# Altium PCB Main.PcbDoc (part 2 of 3)
Units mm, origin at the board's own origin, x right, y up, seen from the top; angles counter-clockwise.
Board outline 100 x 100 mm, 4 copper layers (Top Layer, Layer 2, Layer 3, Bottom Layer), stack 1.606 mm thick; 196 components, 147 nets, 684 pads, 739 vias.
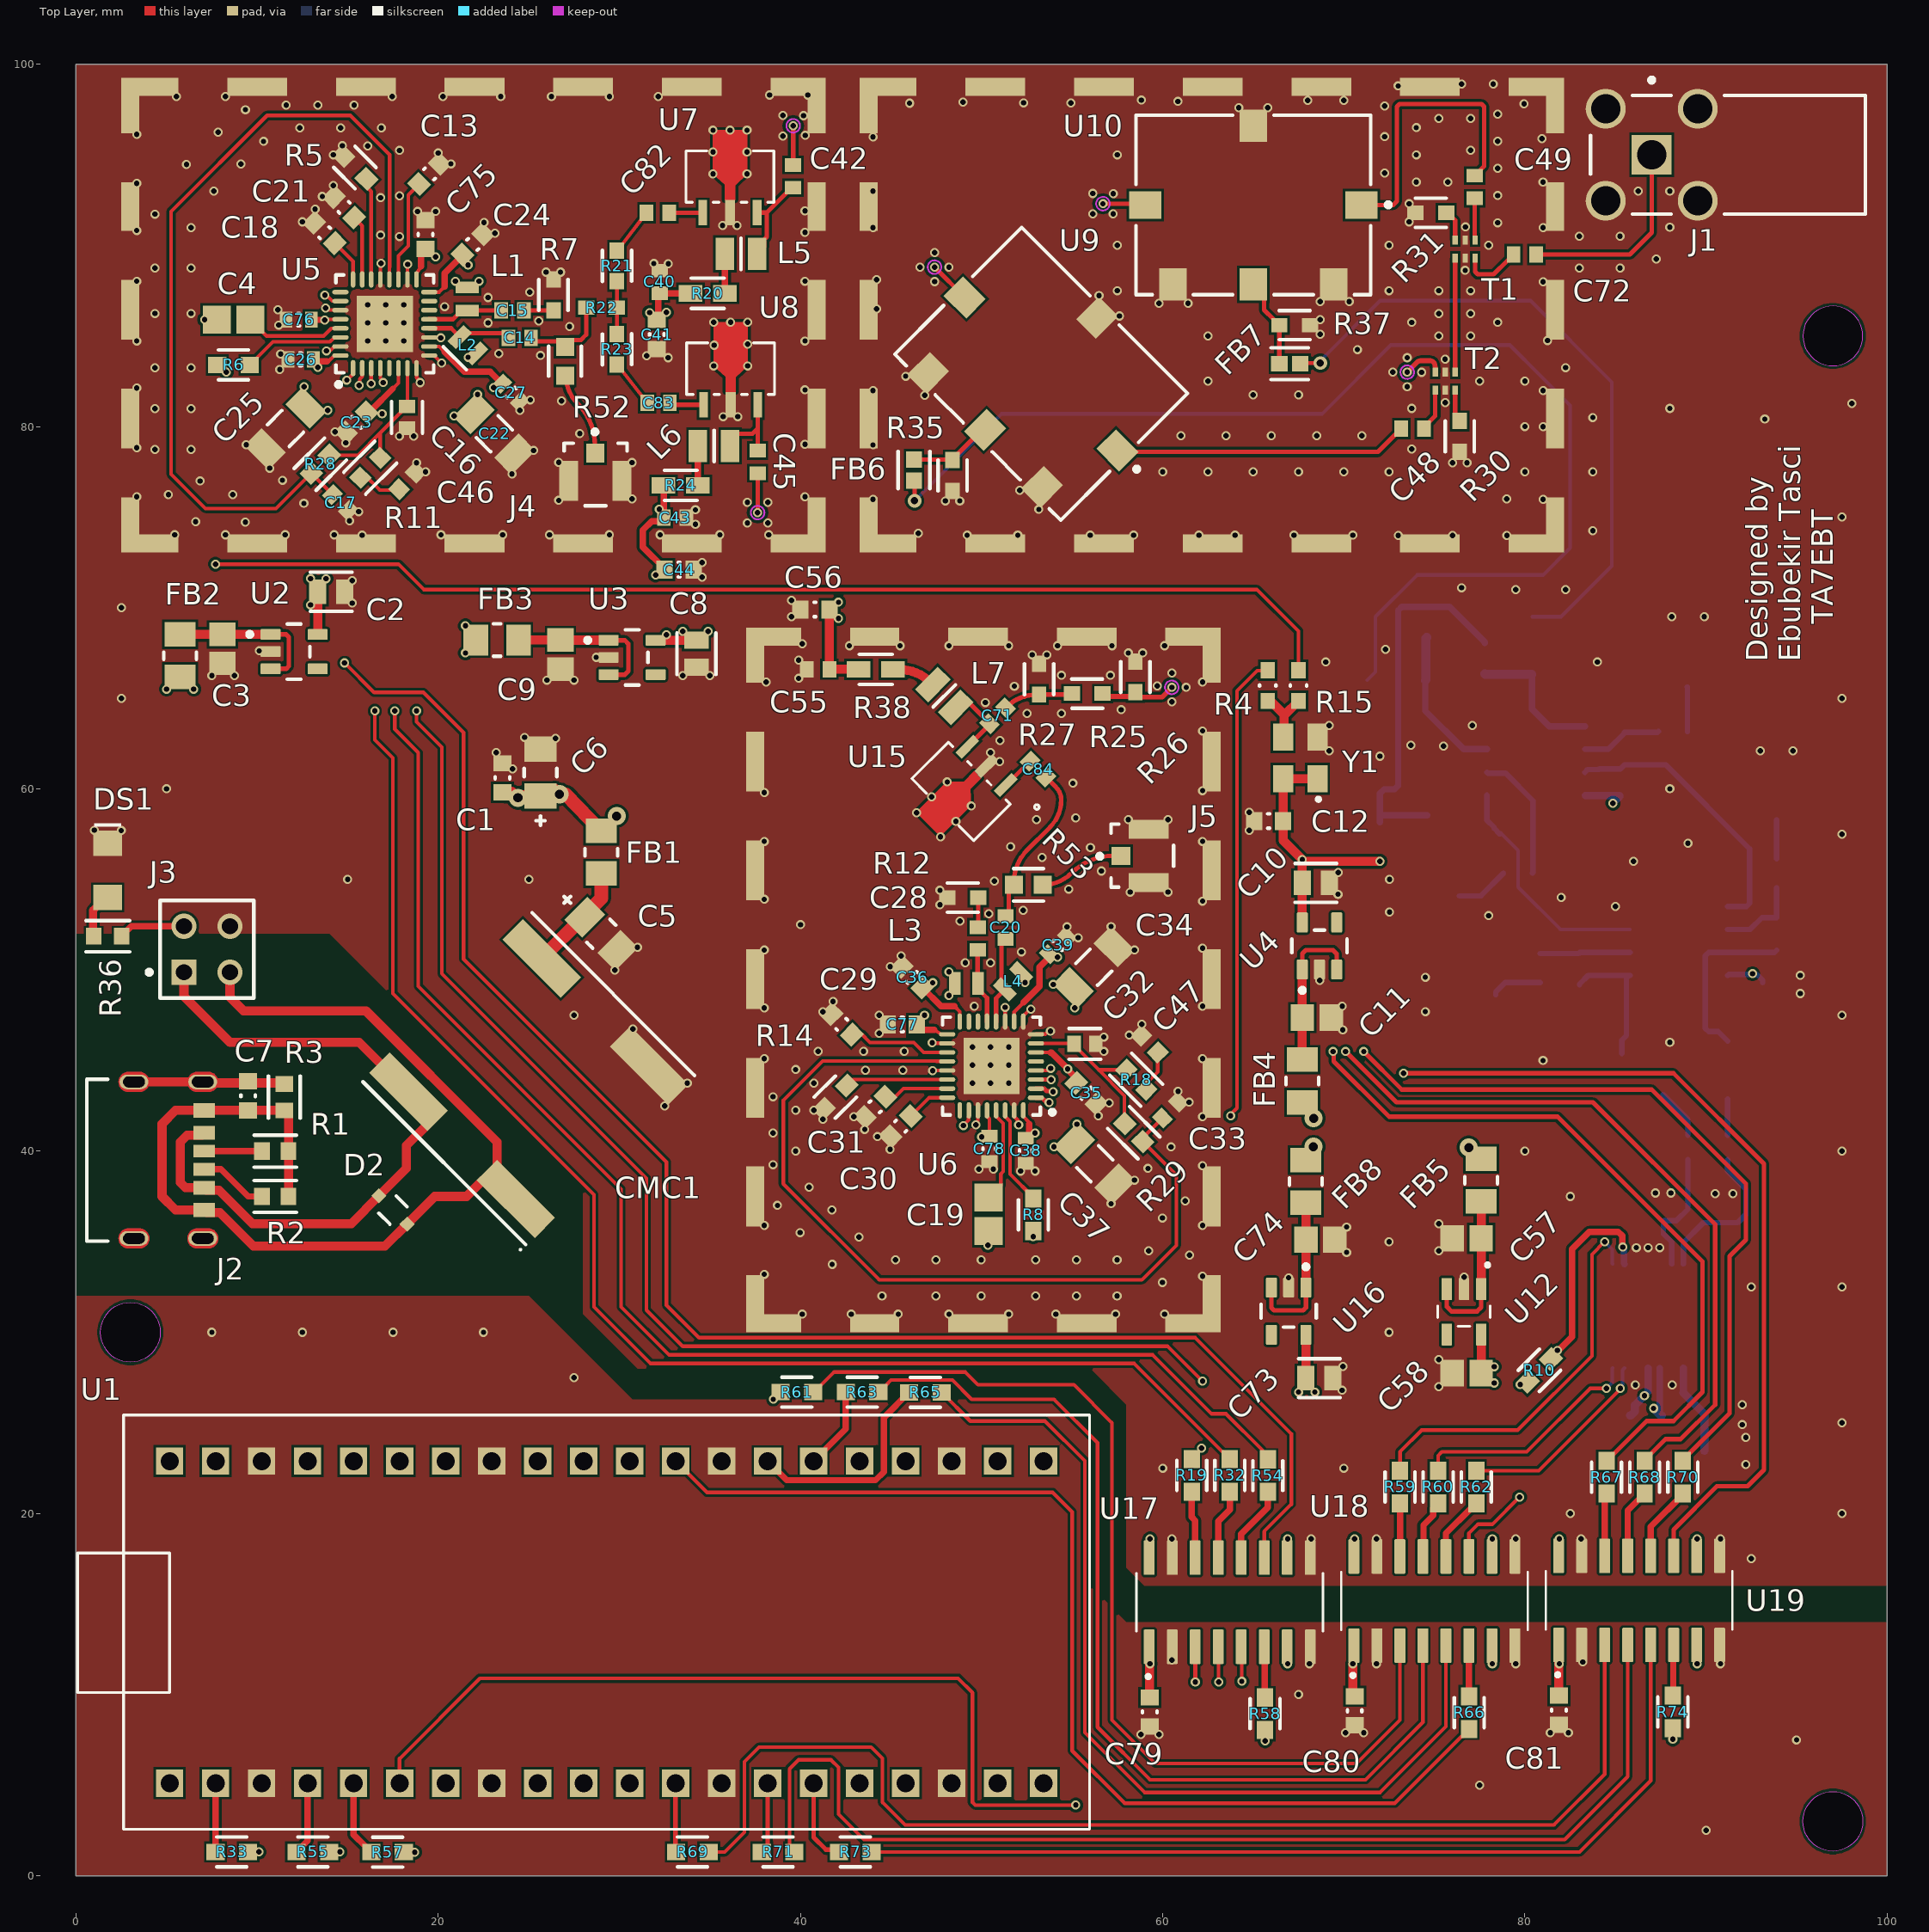
[diagram p0: Top Layer view]

## Part data (continued)
R5 R14 R42 R43 R46 R47: library part CMP-03211-011109-1, "RES SMD 4.7kΩ 0.1% 1/16W 0603", Manufacturer="TE Connectivity", Manufacturer Part Number=CPF0603B15RE, Package=CPF0603, Power Rating=0.063W, Resistance=4.7kΩ, Temperature="-55°C to +155°C", Temperature Coefficient=25ppm/°C, Temperature Range High=+155°C, Temperature Range Low=-55°C, Tolerance=0.1%, Voltage Rating=50V, Automotive=No, Category=Res, ComponentLink2Description=Datasheet, ComponentLink2URL=https://www.te.com/commerce/DocumentDelivery/DDEController?Action=showdoc&DocId=Data+Sheet%7F1773200%7FM%7Fpdf%7FEnglish%7FENG_DS_1773200_M.pdf%7F3-1676481-2, Composition="Thin Film", Device Class L1="Passive Components", Device Class L2=Resistors, Device Class L3="Chip SMD Resistors", Height=0.55mm, Ipc Land Pattern Name=RESC15580X45, Lead Free=Yes, Octopart=https://octopart.com/cpf0603b15re-te+connectivity-23283246, octopart_url=https://octopart.com/cpf0603b15re-te+connectivity-23283246, Packaging="5k Reel", RoHS=TRUE, Series=CPF
R6 R8 R10 R19 R32 R33 R54 R55 R57 R58 R59 R60 R61 R62 R63 R65 R66 R67 R68 R69 R70 R71 R73 R74: library part CMP-03211-006902-1, "RES SMD 33Ω 0.1% 1/16W 0603", Manufacturer="TE Connectivity", Manufacturer Part Number=CPF0603B430RE1, Package=CPF0603, Power Rating=0.063W, Resistance=33Ω, Temperature="-55°C to +155°C", Temperature Coefficient=25ppm/°C, Temperature Range High=+155°C, Temperature Range Low=-55°C, Tolerance=0.1%, Voltage Rating=50V, Automotive=No, Category=Res, ComponentLink2Description=Datasheet, ComponentLink2URL=https://www.te.com/commerce/DocumentDelivery/DDEController?Action=showdoc&DocId=Data+Sheet%7F1773200%7FM%7Fpdf%7FEnglish%7FENG_DS_1773200_M.pdf%7F3-1676481-2, Composition="Thin Film", Device Class L1="Passive Components", Device Class L2=Resistors, Device Class L3="Chip SMD Resistors", Height=0.55mm, Ipc Land Pattern Name=RESC15580X45, Lead Free=Yes, Octopart=https://octopart.com/cpf0603b430re1-te+connectivity-22738753, octopart_url=https://octopart.com/cpf0603b430re1-te+connectivity-22738753, Packaging="1k Reel", RoHS=TRUE, Series=CPF
R7 R12 R30 R31 R35 R37: library part CMP-03412-022019-1, "RES SMD 49.9 OHM 1% 1/10W 0603", Manufacturer=Yageo, Manufacturer Part Number=RT0603FRD0749R9L, Package=RT0603, Power Rating=0.1W, Resistance=49.9Ω, Temperature="-55°C to +155°C", Temperature Coefficient="25 ppm/°C", Temperature Range High=+155°C, Temperature Range Low=-55°C, Tolerance=0.01, Voltage Rating=75V, Automotive=No, Category=Res, ComponentLink2Description=Datasheet, ComponentLink2URL=http://www.yageo.com/documents/recent/PYu-RT_1-to-0.01_RoHS_L_9.pdf, Composition="Thin Film", Device Class L1="Passive Components", Device Class L2=Resistors, Device Class L3="Chip SMD Resistors", Digikey Description="RES SMD 49.9 OHM 1% 1/10W 0603", Footprint Url=http://www.yageo.com/exep/pages/download/literatures/PYu-R_Mount_10.pdf, Height=0.55mm, Ipc Land Pattern Name=RESC16080X45, Lead Free=Yes, Octopart=https://octopart.com/rt0603frd0749r9l-yageo-71395396, RoHS=TRUE, Series=RT
R11 R18 R36: library part CMP-03412-003885-2, "RES 210Ω 1.00% 0.1W 0603", Case Code (Imperial)=0603, Case Code (Metric)=1608, Max Operating Temperature=155°C, Max Power Dissipation=100mW, Min Operating Temperature=-55°C, Resistance=210R, Resistor Type="Thick Film", Temperature Coefficient=100ppm/°C, Tolerance=1%, Voltage Rating=50V, Case/Package=0603, Features="Moisture Resistant", Height=0.022inch, Length=0.063inch, Number of Terminations=2, Packaging="Tape and Reel", Power Rating=100mW, RoHS Compliant=Yes, Series=AC, Termination=SMD/SMT, Width=0.8mm
R20 R24 R38: library part CMP-26527-000122-1, "RES 0 OHM JUMPER 1/4W 0603", Case Code (Imperial)=0603, Case Code (Metric)=1608, Max Operating Temperature=155°C, Min Operating Temperature=-55°C, Package Quantity=5000, Resistance=0mR, Case/Package=0603, Height=0.021inch, Length=0.061inch, Mount="Surface Mount", Number of Terminations=2, Packaging="Tape and Reel", Radiation Hardening=No, RoHS Compliant=Yes, Termination=Wraparound, Width=0.031inch
R21 R22 R23: library part CMP-03412-005655-1, "RES SMD 16.5 OHM 1% 1/10W 0603", Manufacturer=Yageo, Manufacturer Part Number=RT0603FRE0716R5L, Package=RT0603, Power Rating=0.1W, Resistance=16.5Ω, Temperature="-55°C to +155°C", Temperature Coefficient="50 ppm/°C", Temperature Range High=+155°C, Temperature Range Low=-55°C, Tolerance=0.01, Voltage Rating=75V, Automotive=No, Category=Res, ComponentLink2Description=Datasheet, ComponentLink2URL=http://www.yageo.com/documents/recent/PYu-RT_1-to-0.01_RoHS_L_9.pdf, Composition="Thin Film", Device Class L1="Passive Components", Device Class L2=Resistors, Device Class L3="Chip SMD Resistors", Digikey Description="RES SMD 16.5 OHM 1% 1/10W 0603", Footprint Url=http://www.yageo.com/exep/pages/download/literatures/PYu-R_Mount_10.pdf, Height=0.55mm, Ipc Land Pattern Name=RESC16080X45, Lead Free=Yes, Mouser Description="Thin Film Resistors - SMD 1/10W 16.5 ohm 1% 50ppm", Octopart=https://octopart.com/rt0603fre0716r5l-yageo-1472148, RoHS=TRUE, Series=RT
R25: library part CMP-03412-012358-1, "RES SMD 37.4 OHM 0.1% 1/10W 0603", Manufacturer=Yageo, Manufacturer Part Number=RT0603BRD0737R4L, Package=RT0603, Power Rating=0.1W, Resistance=37.4Ω, Temperature="-55°C to +155°C", Temperature Coefficient="25 ppm/°C", Temperature Range High=+155°C, Temperature Range Low=-55°C, Tolerance=0.001, Voltage Rating=75V, Automotive=No, Category=Res, ComponentLink2Description=Datasheet, ComponentLink2URL=http://www.yageo.com/documents/recent/PYu-RT_1-to-0.01_RoHS_L_9.pdf, Composition="Thin Film", Device Class L1="Passive Components", Device Class L2=Resistors, Device Class L3="Chip SMD Resistors", Digikey Description="RES SMD 37.4 OHM 0.1% 1/10W 0603", Footprint Url=http://www.yageo.com/exep/pages/download/literatures/PYu-R_Mount_10.pdf, Height=0.55mm, Ipc Land Pattern Name=RESC16080X45, Lead Free=Yes, Mouser Description="Thin Film Resistors - SMD 1/10W 37.4 ohm .1% 25ppm", Octopart=https://octopart.com/rt0603brd0737r4l-yageo-1279906, RoHS=TRUE, Series=RT
R26 R27: library part CMP-2000-04520-2, "RES 150 OHM 1/10W .1% SMD 0603", Manufacturer=Yageo, Manufacturer Part Number=RT0603BRE07150RL, Package=RT0603, Power Rating=0.1W, Resistance=150Ω, Temperature="-55°C to +155°C", Temperature Coefficient="50 ppm/°C", Temperature Range High=+155°C, Temperature Range Low=-55°C, Tolerance=0.001, Voltage Rating=75V, Automotive=No, Category=Res, ComponentLink2Description=Datasheet, ComponentLink2URL=http://www.yageo.com/documents/recent/PYu-RT_1-to-0.01_RoHS_L_9.pdf, Composition="Thin Film", Device Class L1="Passive Components", Device Class L2=Resistors, Device Class L3="Chip SMD Resistors", Digikey Description="RES 150 OHM 1/10W .1% SMD 0603", Footprint Url=http://www.yageo.com/exep/pages/download/literatures/PYu-R_Mount_10.pdf, Height=0.55mm, Ipc Land Pattern Name=RESC16080X45, Lead Free=Yes, Octopart=https://octopart.com/rt0603bre07150rl-yageo-1267230, RoHS=TRUE, Series=RT
R28 R29: library part CMP-250906-187165-1, "RES Thin Film,  1.3kΩ, 0.1%, 0.1W, 25ppm/°C, 0603"
R34 R39: library part CMP-03412-024743-1, "RES SMD 10K OHM 0.05% 1/10W 0603", Manufacturer=Yageo, Manufacturer Part Number=RT0603WRE0710KL, Package=RT0603, Power Rating=0.1W, Resistance=10KΩ, Temperature="-55°C to +155°C", Temperature Coefficient="50 ppm/°C", Temperature Range High=+155°C, Temperature Range Low=-55°C, Tolerance=0.0005, Voltage Rating=75V, Automotive=No, Category=Res, ComponentLink2Description=Datasheet, ComponentLink2URL=http://www.yageo.com/documents/recent/PYu-RT_1-to-0.01_RoHS_L_9.pdf, Composition="Thin Film", Device Class L1="Passive Components", Device Class L2=Resistors, Device Class L3="Chip SMD Resistors", Digikey Description="RES SMD 10K OHM 0.05% 1/10W 0603", Footprint Url=http://www.yageo.com/exep/pages/download/literatures/PYu-R_Mount_10.pdf, Height=0.55mm, Ipc Land Pattern Name=RESC16080X45, Lead Free=Yes, Mouser Description="Res SMD 10K Ohm 0.05% 1/10W 0603", Octopart=https://octopart.com/rt0603wre0710kl-yageo-71396825, RoHS=TRUE, Series=RT
R40 R41: library part CMP-03412-006967-1, "RT0603 100KΩ 0.1W 50 ppm/°C 1.00%", Manufacturer=Yageo, Manufacturer Part Number=RT0603FRE10100KL, Package=RT0603, Power Rating=0.1W, Resistance=100KΩ, Temperature="-55°C to +155°C", Temperature Coefficient="50 ppm/°C", Temperature Range High=+155°C, Temperature Range Low=-55°C, Tolerance=0.01, Voltage Rating=75V, Automotive=No, Category=Res, ComponentLink2Description=Datasheet, ComponentLink2URL=http://www.yageo.com/documents/recent/PYu-RT_1-to-0.01_RoHS_L_9.pdf, Composition="Thin Film", Device Class L1="Passive Components", Device Class L2=Resistors, Device Class L3="Chip SMD Resistors", Footprint Url=http://www.yageo.com/exep/pages/download/literatures/PYu-R_Mount_10.pdf, Height=0.55mm, Ipc Land Pattern Name=RESC16080X45, Lead Free=Yes, Octopart=https://octopart.com/rt0603fre10100kl-yageo-22252408, RoHS=TRUE, Series=RT
R44 R45 R48 R49 R52 R53: library part CMP-250906-149963-1, "RES Thin Film,  1kΩ, 0.1%, 0.1W, 25ppm/°C, 0603"
R50 R51: library part CMP-02407-008087-1, "RES SMD 100 OHM 1% 1/8W 0603", Case Code (Imperial)=0603, Case Code (Metric)=1608, Max Operating Temperature=175°C, Min Operating Temperature=-55°C, Power Rating=125mW, Resistance=100R, Tolerance=1%, Voltage Rating=75V, Case/Package=0603, Composition="Thin Film", Height=0.45mm, Length=1.55mm, Packaging="Tape and Reel", Termination=SMD/SMT, Weight=6.7E-05oz, Width=0.85mm
T1 T2: library part CMP-012-00000-1, "RF Directional Coupler General Purpose 0603 (1608 Metric), 6 PC Pad", Case/Package="0603 TDK Corporation", Check_prices=https://www.snapeda.com/parts/HHM22137A2/TDK/view-part/?ref=eda, Component Type=Standard, Design Item ID=HHM22137A2, MF="TDK Corporation", MP=HHM22137A2, Pins=6, SnapEDA_Link=https://www.snapeda.com/parts/HHM22137A2/TDK/view-part/?ref=snap, Source=HHM22137A2.SchLib
U1: library part CMP-007-000000-1, "Raspberry Pi Board, Arm Cortex-M0+; Core Architecture:Arm; Core Sub-Architecture:Cortex-M0+; Kit Contents:Raspberry Pi Pico Board; No. Of Bits:32Bit; Silicon Core Number:Rp2040; Silicon Manufacturer:Raspberry Pi", Package=None, Check_prices=https://www.snapeda.com/parts/RASPBERRY%20PI%20PICO/Raspberry+Pi/view-part/?ref=eda, Component Type=Standard, Design Item ID=RASPBERRY_PI_PICO, MF="Raspberry Pi", MP="RASPBERRY PI PICO", Pin Count=40, SnapEDA_Link=https://www.snapeda.com/parts/RASPBERRY%20PI%20PICO/Raspberry+Pi/view-part/?ref=snap, Source=RASPBERRY_PI_PICO.SchLib
U2 U3 U4 U16: library part CMP-04917-000300-1, "IC REG LINEAR 3.3V 300MA SOT23-5", RoHS Compliant=Yes
U5 U6: library part CMP-0287-00014-1, "Wideband Synthesizer with Integrated VCO, CP-32-2, Pb-Free, 490 Tray", Frequency Range=35MHz-4.4GHz, Supply Current=110mA, Code_JEDEC=MO-220-VHHD-2, ComponentLink1Description="Manufacturer URL", ComponentLink1URL=www.analog.com, ComponentLink2Description=Datasheet, ComponentLink2URL=http://www.analog.com/static/imported-files/data_sheets/ADF4351.pdf, ComponentLink3Description="Package Specification", ComponentLink3URL=http://www.analog.com/static/imported-files/packages/414143737956480539664569CP_32_2.pdf, DatasheetVersion="Rev. Pr D", Max REFin (MHz)=250MHz, Max RF Input (MHz)=4.4GHz, Norm Phase Noise (dBc/Hz)=-221dBc, PackageDescription="32-Lead Lead Frame Chip Scale Package [LFCSP_VQ]", PackageReference=CP-32-2, PackageVersion=Jan-2005, RF Prescalers=4/5,8/9, Single/Dual=Single
U7 U8 U15: library part GVA-63+, "No Description Available", Manufacturer_Name="Mini Circuits", Copyright="Copyright (C) 2026 Ultra Librarian. All rights reserved.", Manufacturer_Part_Number=GVA-62+, RefDes=RefDes, Type=RF
U9 U10: library part CMP-199893-000002-1, "RF Mixer IC Cellular, GPS, ISM, PCS, WCDMA 1MHz ~ 6GHz", RoHS Compliant=Yes
U11: library part CMP-052-000000-1, "24-bit, 99-dB SNR, 96-kHz stereo ADC with single-ended inputs", Package="TSSOP-14 Texas Instruments", Check_prices=https://www.snapeda.com/parts/PCM1808PWR/Texas+Instruments/view-part/?ref=eda, Component Type=Standard, Design Item ID=PCM1808PWR, MF="Texas Instruments", MP=PCM1808PWR, Pin Count=14, SnapEDA_Link=https://www.snapeda.com/parts/PCM1808PWR/Texas+Instruments/view-part/?ref=snap, Source=PCM1808PWR.SchLib
U12: library part CMP-056-000000-1, Package=None, Availability=Unavailable, Component Type=Standard, Design Item ID=TPS7A2045PDBVR, MF="{'manufacturer': u'Texas Instruments'}", MP=TPS7A2045PDBVR, Pin Count=5, Price=None, Source=TPS7A2045PDBVR.SchLib